# EAGLE board pillfinal(NEW) (EAGLE 7.7.0)
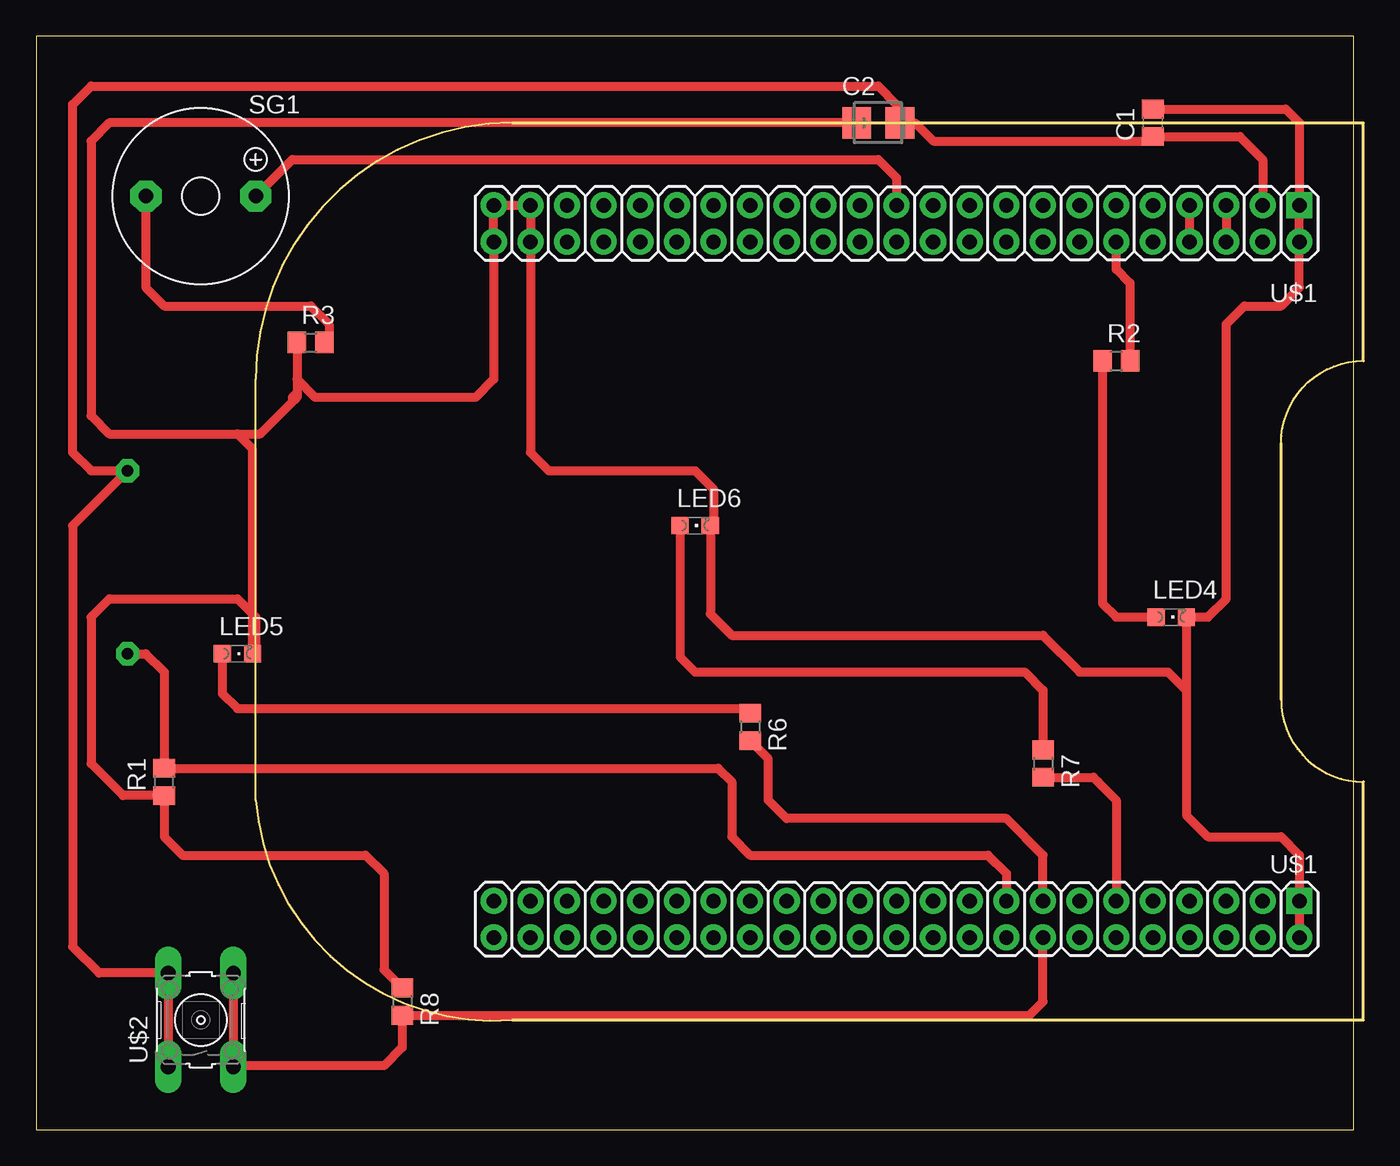
[diagram p0: board, top side]
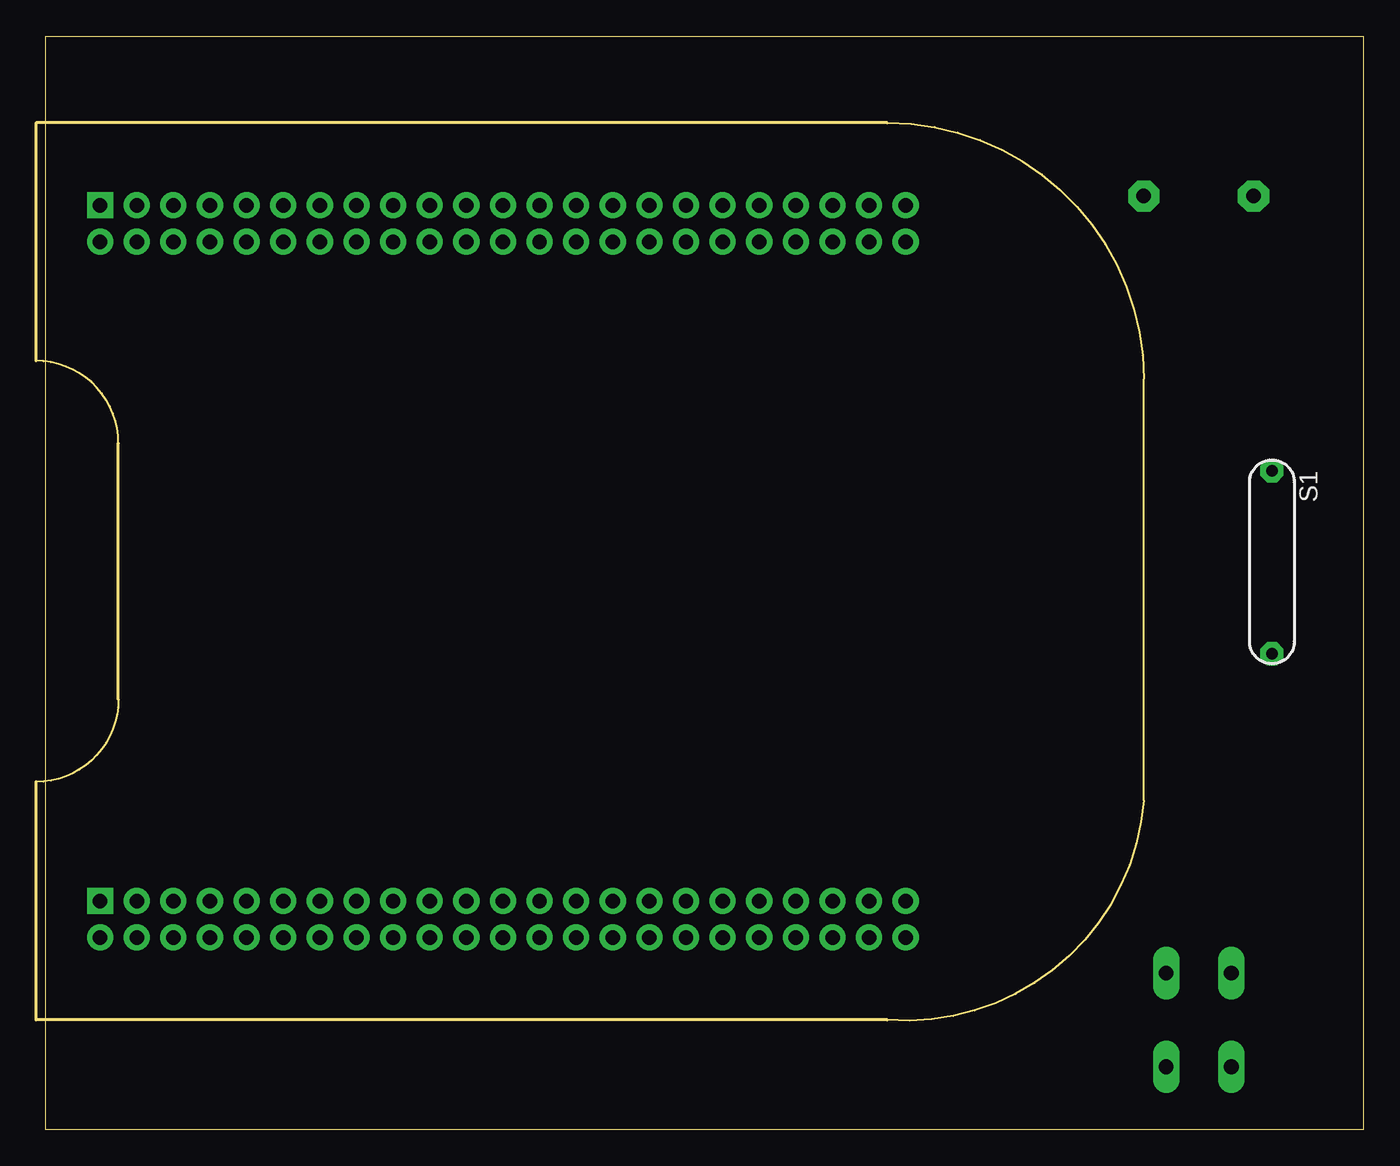
[diagram p1: board, bottom side, seen from below]

Size 91.42 x 75.87 mm. Coordinates in mm from the lower left corner, seen from the top.
Outline: 0,0 91.42,0 91.42,75.87 0,75.87 0,0
Copper layers (1*16): Top 0.035mm / dielectric 1.5mm / Bottom 0.035mm
Design rules "default *": minimum track width 16mil, minimum drill 24mil, track to track 16mil, track to pad 16mil, pad to pad 16mil, via to via 16mil, smd to smd 8mil, copper to edge 40mil, drill to drill 8mil, minimum pad ring 16mil, minimum via ring 16mil, stop-mask expansion 4mil, vias tented up to drill 0mil, thermal gap 10mil

## Footprints (pad centres in the part's own frame; a part is rotated, then mirrored left to right if it is on the bottom)
C0805 = smd 1.3 x 1.5: 1 -0.95,0; 2 0.95,0
CT3528 = smd 2 x 2.2: + -1.5,0; - 1.5,0
CHIPLED_0805 = smd 1.2 x 1.2: A 0,-1.05; C 0,1.05
R0805 = smd 1.3 x 1.5: 1 -0.95,0; 2 0.95,0
MK6-5 = drill 0.6 pad 1.016: 1 -6.35,0; 2 6.35,0
F/TMB = drill 1.016 pad 2.159 octagon: + 3.81,0; - -3.81,0
BEAGLEBONE_CAPE = drill 1 square: 1 4.445,19.05; 47 52.705,19.05 | drill 1: 2 1.905,19.05; 3 4.445,21.59; 4 1.905,21.59; 5 4.445,24.13; 6 1.905,24.13; 7 4.445,26.67; 8 1.905,26.67; 9 4.445,29.21; 10 1.905,29.21; 11 4.445,31.75; 12 1.905,31.75; 13 4.445,34.29; 14 1.905,34.29; 15 4.445,36.83; 16 1.905,36.83; 17 4.445,39.37; 18 1.905,39.37; 19 4.445,41.91; 20 1.905,41.91; 21 4.445,44.45; 22 1.905,44.45; 23 4.445,46.99; 24 1.905,46.99; 25 4.445,49.53; 26 1.905,49.53; 27 4.445,52.07; 28 1.905,52.07; 29 4.445,54.61; 30 1.905,54.61; 31 4.445,57.15; 32 1.905,57.15; 33 4.445,59.69; 34 1.905,59.69; 35 4.445,62.23; 36 1.905,62.23; 37 4.445,64.77; 38 1.905,64.77; 39 4.445,67.31; 40 1.905,67.31; 41 4.445,69.85; 42 1.905,69.85; 43 4.445,72.39; 44 1.905,72.39; 45 4.445,74.93; 46 1.905,74.93; 48 50.165,19.05; 49 52.705,21.59; 50 50.165,21.59; 51 52.705,24.13; 52 50.165,24.13; 53 52.705,26.67; 54 50.165,26.67; 55 52.705,29.21; 56 50.165,29.21; 57 52.705,31.75; 58 50.165,31.75; 59 52.705,34.29; 60 50.165,34.29; 61 52.705,36.83; 62 50.165,36.83; 63 52.705,39.37; 64 50.165,39.37; 65 52.705,41.91; 66 50.165,41.91; 67 52.705,44.45; 68 50.165,44.45; 69 52.705,46.99; 70 50.165,46.99; 71 52.705,49.53; 72 50.165,49.53; 73 52.705,52.07; 74 50.165,52.07; 75 52.705,54.61; 76 50.165,54.61; 77 52.705,57.15; 78 50.165,57.15; 79 52.705,59.69; 80 50.165,59.69; 81 52.705,62.23; 82 50.165,62.23; 83 52.705,64.77; 84 50.165,64.77; 85 52.705,67.31; 86 50.165,67.31; 87 52.705,69.85; 88 50.165,69.85; 89 52.705,72.39; 90 50.165,72.39; 91 52.705,74.93; 92 50.165,74.93
B3F-10XX = drill 1.016 long: 1 -3.251,2.261; 2 3.251,2.261; 3 -3.251,-2.261; 4 3.251,-2.261

## Placement (x,y rotation side)
C1  0.1u  [C0805]  77.47,69.85 90 top
C2  1u  [CT3528]  58.42,69.85 0 top
LED4  [CHIPLED_0805]  78.74,35.56 270 top
LED5  [CHIPLED_0805]  13.97,33.02 270 top
LED6  [CHIPLED_0805]  45.72,41.91 270 top
R1  1k  [R0805]  8.89,24.13 90 top
R2  1k  [R0805]  74.93,53.34 0 top
R3  1k  [R0805]  19.05,54.61 0 top
R6  1k  [R0805]  49.53,27.94 270 top
R7  1k  [R0805]  69.85,25.4 270 top
R8  1k  [R0805]  25.4,8.89 270 top
S1  REED-SWITCH-MK6-5-B  [MK6-5]  6.35,39.37 270 bottom
SG1  BUZZER  [F/TMB]  11.43,64.77 0 top
U$1  BEAGLEBONE_CAPE  [BEAGLEBONE_CAPE]  106.68,11.43 90 top
U$2  OMRON_SWITCH_10-XX  [B3F-10XX]  11.43,7.62 90 top

## Library data of the parts
C1 U$1 U$2 = CEDT_JANUARY_2015_v5
C2 = resistor
LED4-LED6 = CPO
R1-R3 R6-R8 = rcl
S1 = switch-reed; MF: MEDER; MPN: MK6-5-B; OC_FARNELL: 1079479
SG1 = CEDT_JANUARY_2015_v5; OC_FARNELL: unknown; OC_NEWARK: unknown

## Nets
3.3V: C1.1 C2.- S1.1 U$1.49 U$2.1 U$2.2
GND: C1.2 C2.+ LED4.C LED5.C LED6.C R1.1 R3.1 R8.1 U$1.1 U$1.2 U$1.47 U$1.48 U$1.89 U$1.90 U$1.91 U$1.92
GNDA_ADC: U$1.80
LED1: R7.2 U$1.11
LED2: R6.2 U$1.15
LED3: R2.2 U$1.58
N$1: LED4.A R2.1
N$4: R3.2 SG1.-
N$5: LED5.A R6.1
N$6: LED6.A R7.1
N$10: SG1.+ U$1.69
P9: R8.2 U$1.16 U$2.3 U$2.4
REED: R1.2 S1.2 U$1.17
SYS_5V: U$1.53 U$1.54
VDD_3V3EXP: U$1.50
VDD_5V: U$1.51 U$1.52
VDD_ADC: U$1.78

## Tracks (layer width: path | path; a pad name or v marks a point on that pad's centre or on a via)
3.3V
  Top 0.61: U$2.1 U$2.2 4.37,10.87 2.54,12.7 2.54,41.91 S1.1 3.81,45.72 2.54,46.99 2.54,71.12 3.81,72.39 58.42,72.39 59.69,71.12 59.69,70.08 C2.- | C2.- 59.69,69.85 | C2.- 60.96,69.85 62.23,68.58 77.15,68.58 C1.1 83.5,68.9 85.09,67.31 U$1.49
GND
  Top 0.61: 25.4,10.16 R8.1 24.13,11.11 24.13,17.78 22.86,19.05 10.16,19.05 8.89,20.32 R1.1 6.03,23.18 3.81,25.4 3.81,35.56 5.08,36.83 13.97,36.83 15.24,35.56 15.24,33.24 LED5.C 15.02,47.21 13.97,48.26 | 79.79,30.48 79.79,27.94 79.79,21.81 81.28,20.32 86.36,20.32 87.63,19.05 U$1.1 U$1.2 | 79.79,30.48 78.52,31.75 72.39,31.75 69.85,34.29 48.26,34.29 46.77,35.78 LED6.C 46.99,42.13 46.99,44.45 45.72,45.72 35.56,45.72 34.29,46.99 U$1.90 U$1.89 34.29,64.77 33.66,64.14 U$1.91 U$1.92 31.75,52.07 30.48,50.8 19.37,50.8 18.1,52.07 18.1,50.8 17.78,50.48 | C2.+ 5.08,69.85 3.81,68.58 3.81,49.53 5.08,48.26 13.97,48.26 | 13.97,48.26 15.56,48.26 17.78,50.48 | C1.2 86.68,70.8 87.63,69.85 U$1.47 U$1.48 87.63,58.42 86.36,57.15 83.82,57.15 82.55,55.88 82.55,36.83 81.28,35.56 LED4.C 79.79,30.48 | R3.1 18.1,51.12 17.78,50.8 17.78,50.48
LED1
  Top 0.61: U$1.11 74.93,22.86 73.66,24.13 73.34,24.45 R7.2
LED2
  Top 0.61: U$1.15 69.85,19.05 67.31,21.59 52.07,21.59 50.8,22.86 50.8,25.72 R6.2
LED3
  Top 0.61: U$1.58 74.93,59.69 75.88,58.74 R2.2
N$1
  Top 0.61: R2.1 73.98,36.51 74.93,35.56 LED4.A
N$2  (via drill 0.8)
  other vias: 6.35,33.02
N$3  (via drill 0.8)
  other vias: 6.35,45.72
N$4
  Top 0.61: SG1.- 7.62,58.42 8.89,57.15 19.05,57.15 20.32,55.88 20.32,54.93 R3.2
N$5
  Top 0.61: LED5.A 12.92,30.26 13.97,29.21 49.21,29.21 R6.1
N$6
  Top 0.61: LED6.A 44.67,32.8 45.72,31.75 68.58,31.75 69.85,30.48 R7.1
N$10
  Top 0.61: U$1.69 59.69,66.04 58.42,67.31 17.78,67.31 SG1.+
P9
  Top 0.61: U$2.4 U$2.3 13.77,4.45 24.13,4.45 25.4,5.71 R8.2 68.9,7.94 69.85,8.89 U$1.16
REED
  Top 0.61: S1.2 7.62,33.02 8.89,31.75 R1.2 47.31,25.08 48.26,24.13 48.26,20.32 49.53,19.05 66.04,19.05 67.31,17.78 U$1.17
SYS_5V
  Top 0.61: U$1.53 U$1.54
VDD_5V
  Top 0.61: U$1.51 U$1.52